# EAGLE board Pentabyte_PCB (EAGLE 9.7.0)
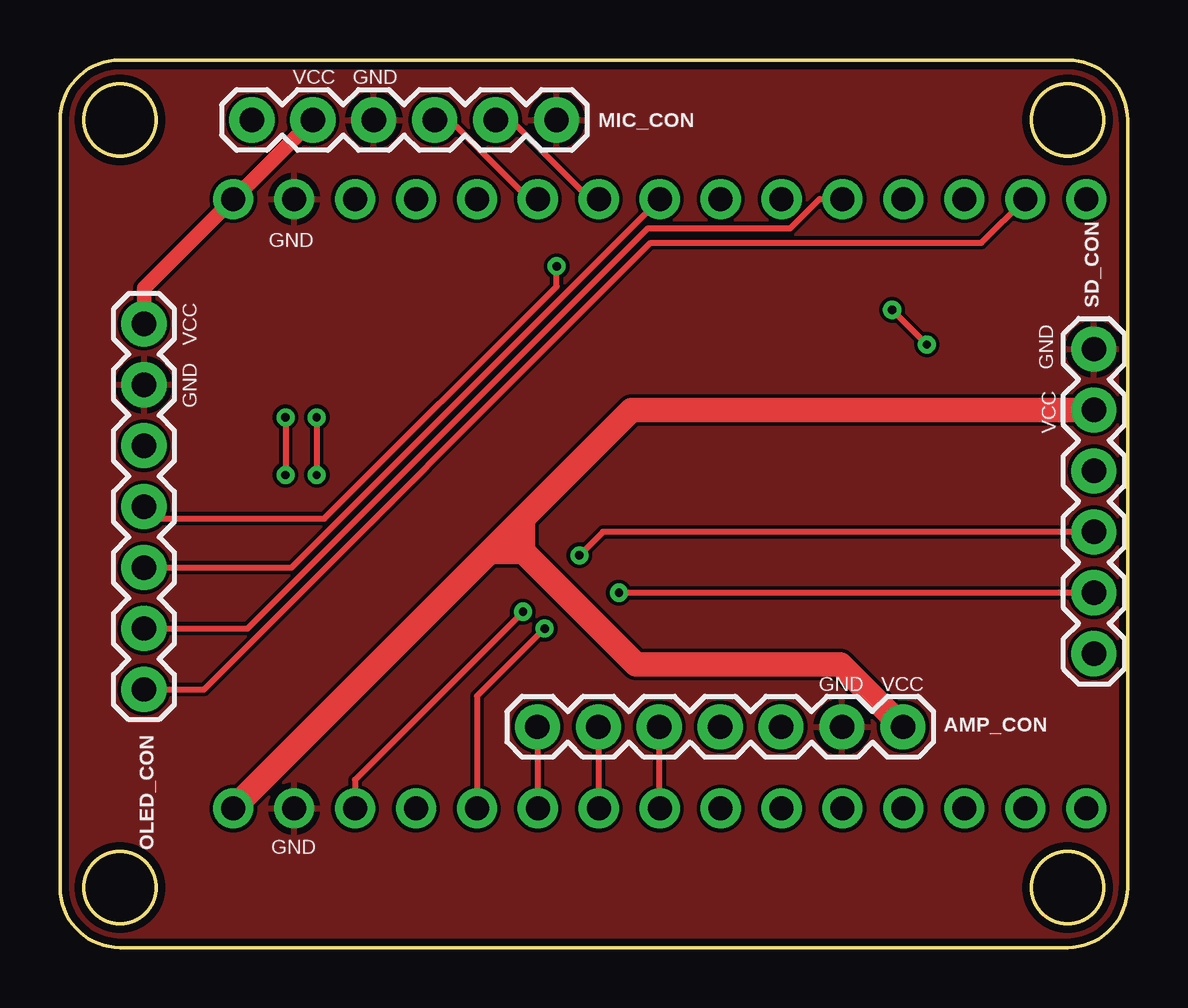
[diagram p0: board, top side]
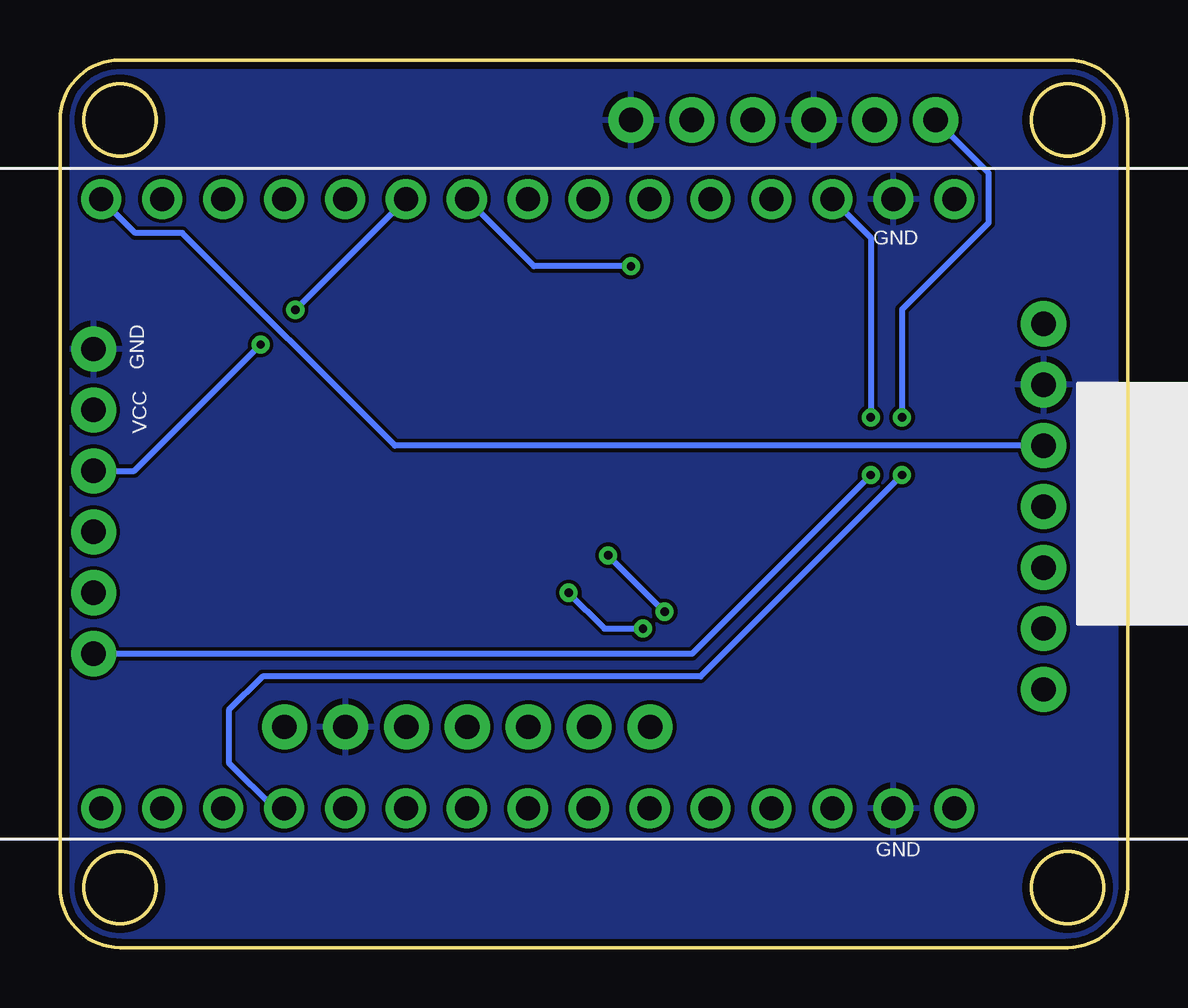
[diagram p1: board, bottom side, seen from below]

Size 44.5 x 37 mm. Coordinates in mm from the lower left corner, seen from the top.
Outline: 2.5,0 arc-90 0,2.5 0,34.5 arc-90 2.5,37 42,37 arc-90 44.5,34.5 44.5,2.5 arc-90 42,0 2.5,0
Outline: circle at 2.5,2.5 radius 1.5
Outline: circle at 2.5,34.5 radius 1.5
Outline: circle at 42,2.5 radius 1.5
Outline: circle at 42,34.5 radius 1.5
Copper layers (1*16): Top 0.035mm / dielectric 1.5mm / Bottom 0.035mm
Design rules "Fusion Electronics Design Rules": minimum track width 6mil, minimum drill 0.35mm, track to track 6mil, track to pad 6mil, pad to pad 6mil, via to via 6mil, smd to smd 6mil, copper to edge 0.3mm, drill to drill 6mil, minimum pad ring 10mil, minimum via ring 8mil, stop-mask expansion 4mil, vias tented up to drill 9999mil, thermal gap 10mil

## Footprints (pad centres in the part's own frame; a part is rotated, then mirrored left to right if it is on the bottom)
1X07 = drill 1.016 pad 1.88: 1 0,0; 2 2.54,0; 3 5.08,0; 4 7.62,0; 5 10.16,0; 6 12.7,0; 7 15.24,0
1X06 = drill 1.016 pad 1.88: 1 0,0; 2 2.54,0; 3 5.08,0; 4 7.62,0; 5 10.16,0; 6 12.7,0
ESP-WROOM-32 = drill 1 pad 1.676: P$1 12.7,17.78; P$2 12.7,15.24; P$3 12.7,12.7; P$4 12.7,10.16; P$5 12.7,7.62; P$6 12.7,5.08; P$7 12.7,2.54; P$8 12.7,0; P$9 12.7,-2.54; P$10 12.7,-5.08; P$11 12.7,-7.62; P$12 12.7,-10.16; P$13 12.7,-12.7; P$14 12.7,-15.24; P$15 12.7,-17.78; P$16 -12.7,17.78; P$17 -12.7,15.24; P$18 -12.7,12.7; P$19 -12.7,10.16; P$20 -12.7,7.62; P$21 -12.7,5.08; P$22 -12.7,2.54; P$23 -12.7,0; P$24 -12.7,-2.54; P$25 -12.7,-5.08; P$26 -12.7,-7.62; P$27 -12.7,-10.16; P$28 -12.7,-12.7; P$29 -12.7,-15.24; P$30 -12.7,-17.78

## Placement (x,y rotation side)
AMP_CON  [1X07]  19.9,9.2 0 top
MIC_CON  [1X06]  8,34.5 0 top
OLED_CON  [1X07]  3.5,26 270 top
SD_CON  [1X06]  43.1,12.25 90 top
U$1  ESP-WROOM-32_DEVKITESP-WROOM-32  [ESP-WROOM-32]  25,18.5 270 bottom

## Library data of the parts
AMP_CON OLED_CON = SparkFun-Connectors
MIC_CON SD_CON = SparkFun-Connectors; PROD_ID: CONN-08437
U$1 = ESP-WROOM-32

## Nets
3V3: MIC_CON.2 OLED_CON.1 U$1.P$16
5V: AMP_CON.7 SD_CON.5 U$1.P$1
CLK_AMP: AMP_CON.2 U$1.P$7
CLK_S: OLED_CON.4 U$1.P$24
CS_S: OLED_CON.5 U$1.P$23
CS_SD: SD_CON.1 U$1.P$18
DC_S: OLED_CON.6 U$1.P$26
DIN_AMP: AMP_CON.3 U$1.P$8
DIN_S: OLED_CON.3 U$1.P$30
GAIN_AMP: AMP_CON.4
GND: AMP_CON.6 MIC_CON.3 MIC_CON.6 OLED_CON.2 SD_CON.6 U$1.P$2 U$1.P$17
LRC_AMP: AMP_CON.1 U$1.P$6
MISO_SD: SD_CON.4 U$1.P$25
MOSI_SD: SD_CON.3 U$1.P$3
RST_S: OLED_CON.7 U$1.P$29
SCK_MIC: MIC_CON.4 U$1.P$21
SCK_SD: SD_CON.2 U$1.P$5
SD_MIC: MIC_CON.1 U$1.P$12
SO_AMP: AMP_CON.5
WS_MIC: MIC_CON.5 U$1.P$22

## Tracks (layer width: path | path; a pad name or v marks a point on that pad's centre or on a via)
3V3
  Top 0.61: MIC_CON.2 7.24,31.2 U$1.P$16 3.5,27.48 OLED_CON.1
5V
  Top 1.016: U$1.P$1 17.91,16.49 | 17.91,16.49 18.61,17.19 | 18.61,17.19 19.31,17.89 | 19.31,17.89 23.83,22.41 SD_CON.5 | 18.61,17.19 24,11.8 32.54,11.8 AMP_CON.7 | 17.91,16.49 19.31,16.49 19.31,17.89
CLK_AMP
  Top 0.254: AMP_CON.2 22.44,5.82 U$1.P$7
CLK_S  (via drill 0.35)
  Top 0.254: OLED_CON.4 4,17.88 11.02,17.88 20.7,27.56 v20.7,28.4
  Bottom 0.254: v20.7,28.4 24.74,28.4 U$1.P$24
CS_S
  Top 0.254: U$1.P$23 9.65,15.84 OLED_CON.5
CS_SD  (via drill 0.35)
  Top 0.254: v10.7,22.1 v10.7,19.7
  Bottom 0.254: U$1.P$18 10.7,29.6 v10.7,22.1 | v10.7,19.7 18.15,12.25 SD_CON.1
DC_S
  Top 0.254: OLED_CON.6 7.82,13.3 24.5,29.98 30.44,29.98 31.66,31.2 U$1.P$26
DIN_AMP
  Top 0.254: AMP_CON.3 24.98,5.82 U$1.P$8
DIN_S
  Bottom 0.254: OLED_CON.3 30.54,20.92 39.4,29.78 41.36,29.78 U$1.P$30
GND
  pour Top: 2.5,0.08 42,0.08 42.34,0.1 42.68,0.17 43.01,0.3 43.31,0.46 43.59,0.67 43.83,0.91 44.04,1.19 44.2,1.49 44.33,1.82 44.4,2.16 44.42,2.5 44.42,34.5 44.4,34.84 44.33,35.18 44.2,35.51 44.04,35.81 43.83,36.09 43.59,36.33 43.31,36.54 43.01,36.7 42.68,36.83 42.34,36.9 42,36.92 2.5,36.92 2.16,36.9 1.82,36.83 1.49,36.7 1.19,36.54 0.91,36.33 0.67,36.09 0.46,35.81 0.3,35.51 0.17,35.18 0.1,34.84 0.08,34.5 0.08,2.5 0.1,2.16 0.17,1.82 0.3,1.49 0.46,1.19 0.67,0.91 0.91,0.67 1.19,0.46 1.49,0.3 1.82,0.17 2.16,0.1
  pour Bottom: 2.5,0.08 42,0.08 42.34,0.1 42.68,0.17 43.01,0.3 43.31,0.46 43.59,0.67 43.83,0.91 44.04,1.19 44.2,1.49 44.33,1.82 44.4,2.16 44.42,2.5 44.42,34.5 44.4,34.84 44.33,35.18 44.2,35.51 44.04,35.81 43.83,36.09 43.59,36.33 43.31,36.54 43.01,36.7 42.68,36.83 42.34,36.9 42,36.92 2.5,36.92 2.16,36.9 1.82,36.83 1.49,36.7 1.19,36.54 0.91,36.33 0.67,36.09 0.46,35.81 0.3,35.51 0.17,35.18 0.1,34.84 0.08,34.5 0.08,2.5 0.1,2.16 0.17,1.82 0.3,1.49 0.46,1.19 0.67,0.91 0.91,0.67 1.19,0.46 1.49,0.3 1.82,0.17 2.16,0.1
LRC_AMP
  Top 0.254: AMP_CON.1 19.9,5.82 U$1.P$6
MISO_SD  (via drill 0.35)
  Top 0.254: v36.13,25.14 v34.69,26.59
  Bottom 0.254: SD_CON.4 41.4,19.87 v36.13,25.14 | v34.69,26.59 U$1.P$25
MOSI_SD  (via drill 0.35)
  Top 0.254: SD_CON.3 22.63,17.33 v21.65,16.35 | v19.3,14 12.3,7 U$1.P$3
  Bottom 0.254: v21.65,16.35 v19.3,14
RST_S
  Top 0.254: OLED_CON.7 6,10.76 24.62,29.38 38.42,29.38 U$1.P$29
SCK_MIC
  Top 0.254: MIC_CON.4 16.26,34.5 19.56,31.2 U$1.P$21
SCK_SD  (via drill 0.35)
  Top 0.254: U$1.P$5 17.38,10.48 v20.2,13.3 | SD_CON.2 v23.3,14.79
  Bottom 0.254: v23.3,14.79 21.81,13.3 v20.2,13.3
SD_MIC  (via drill 0.35)
  Top 0.254: v9.4,22.1 v9.4,19.7
  Bottom 0.254: MIC_CON.1 5.8,32.3 5.8,30.2 9.4,26.6 v9.4,22.1 | v9.4,19.7 17.8,11.3 36.06,11.3 37.46,9.9 37.46,7.7 35.56,5.8 U$1.P$12
WS_MIC
  Top 0.254: MIC_CON.5 18.8,34.5 22.1,31.2 U$1.P$22

## Text on the board
tPlace: VCC | GND | GND | VCC | GND | VCC | GND | GND | VCC | GND
bPlace: GND | GND | VCC | GND